# Altium PCB PC110.PcbDoc (part 21 of 24)
Units mm, origin at the board's own origin, x right, y up, seen from the top; angles counter-clockwise.
Board outline 150.05 x 107.35 mm, 10 copper layers (In2.Cu, F.Cu, B.Cu, In1.Cu, In3.Cu, In4.Cu, In5.Cu, In6.Cu, In7.Cu, In8.Cu); 936 components, 1434 nets, 4891 pads, 6088 vias.
Unrouted connection lines stored in the file: 2995.
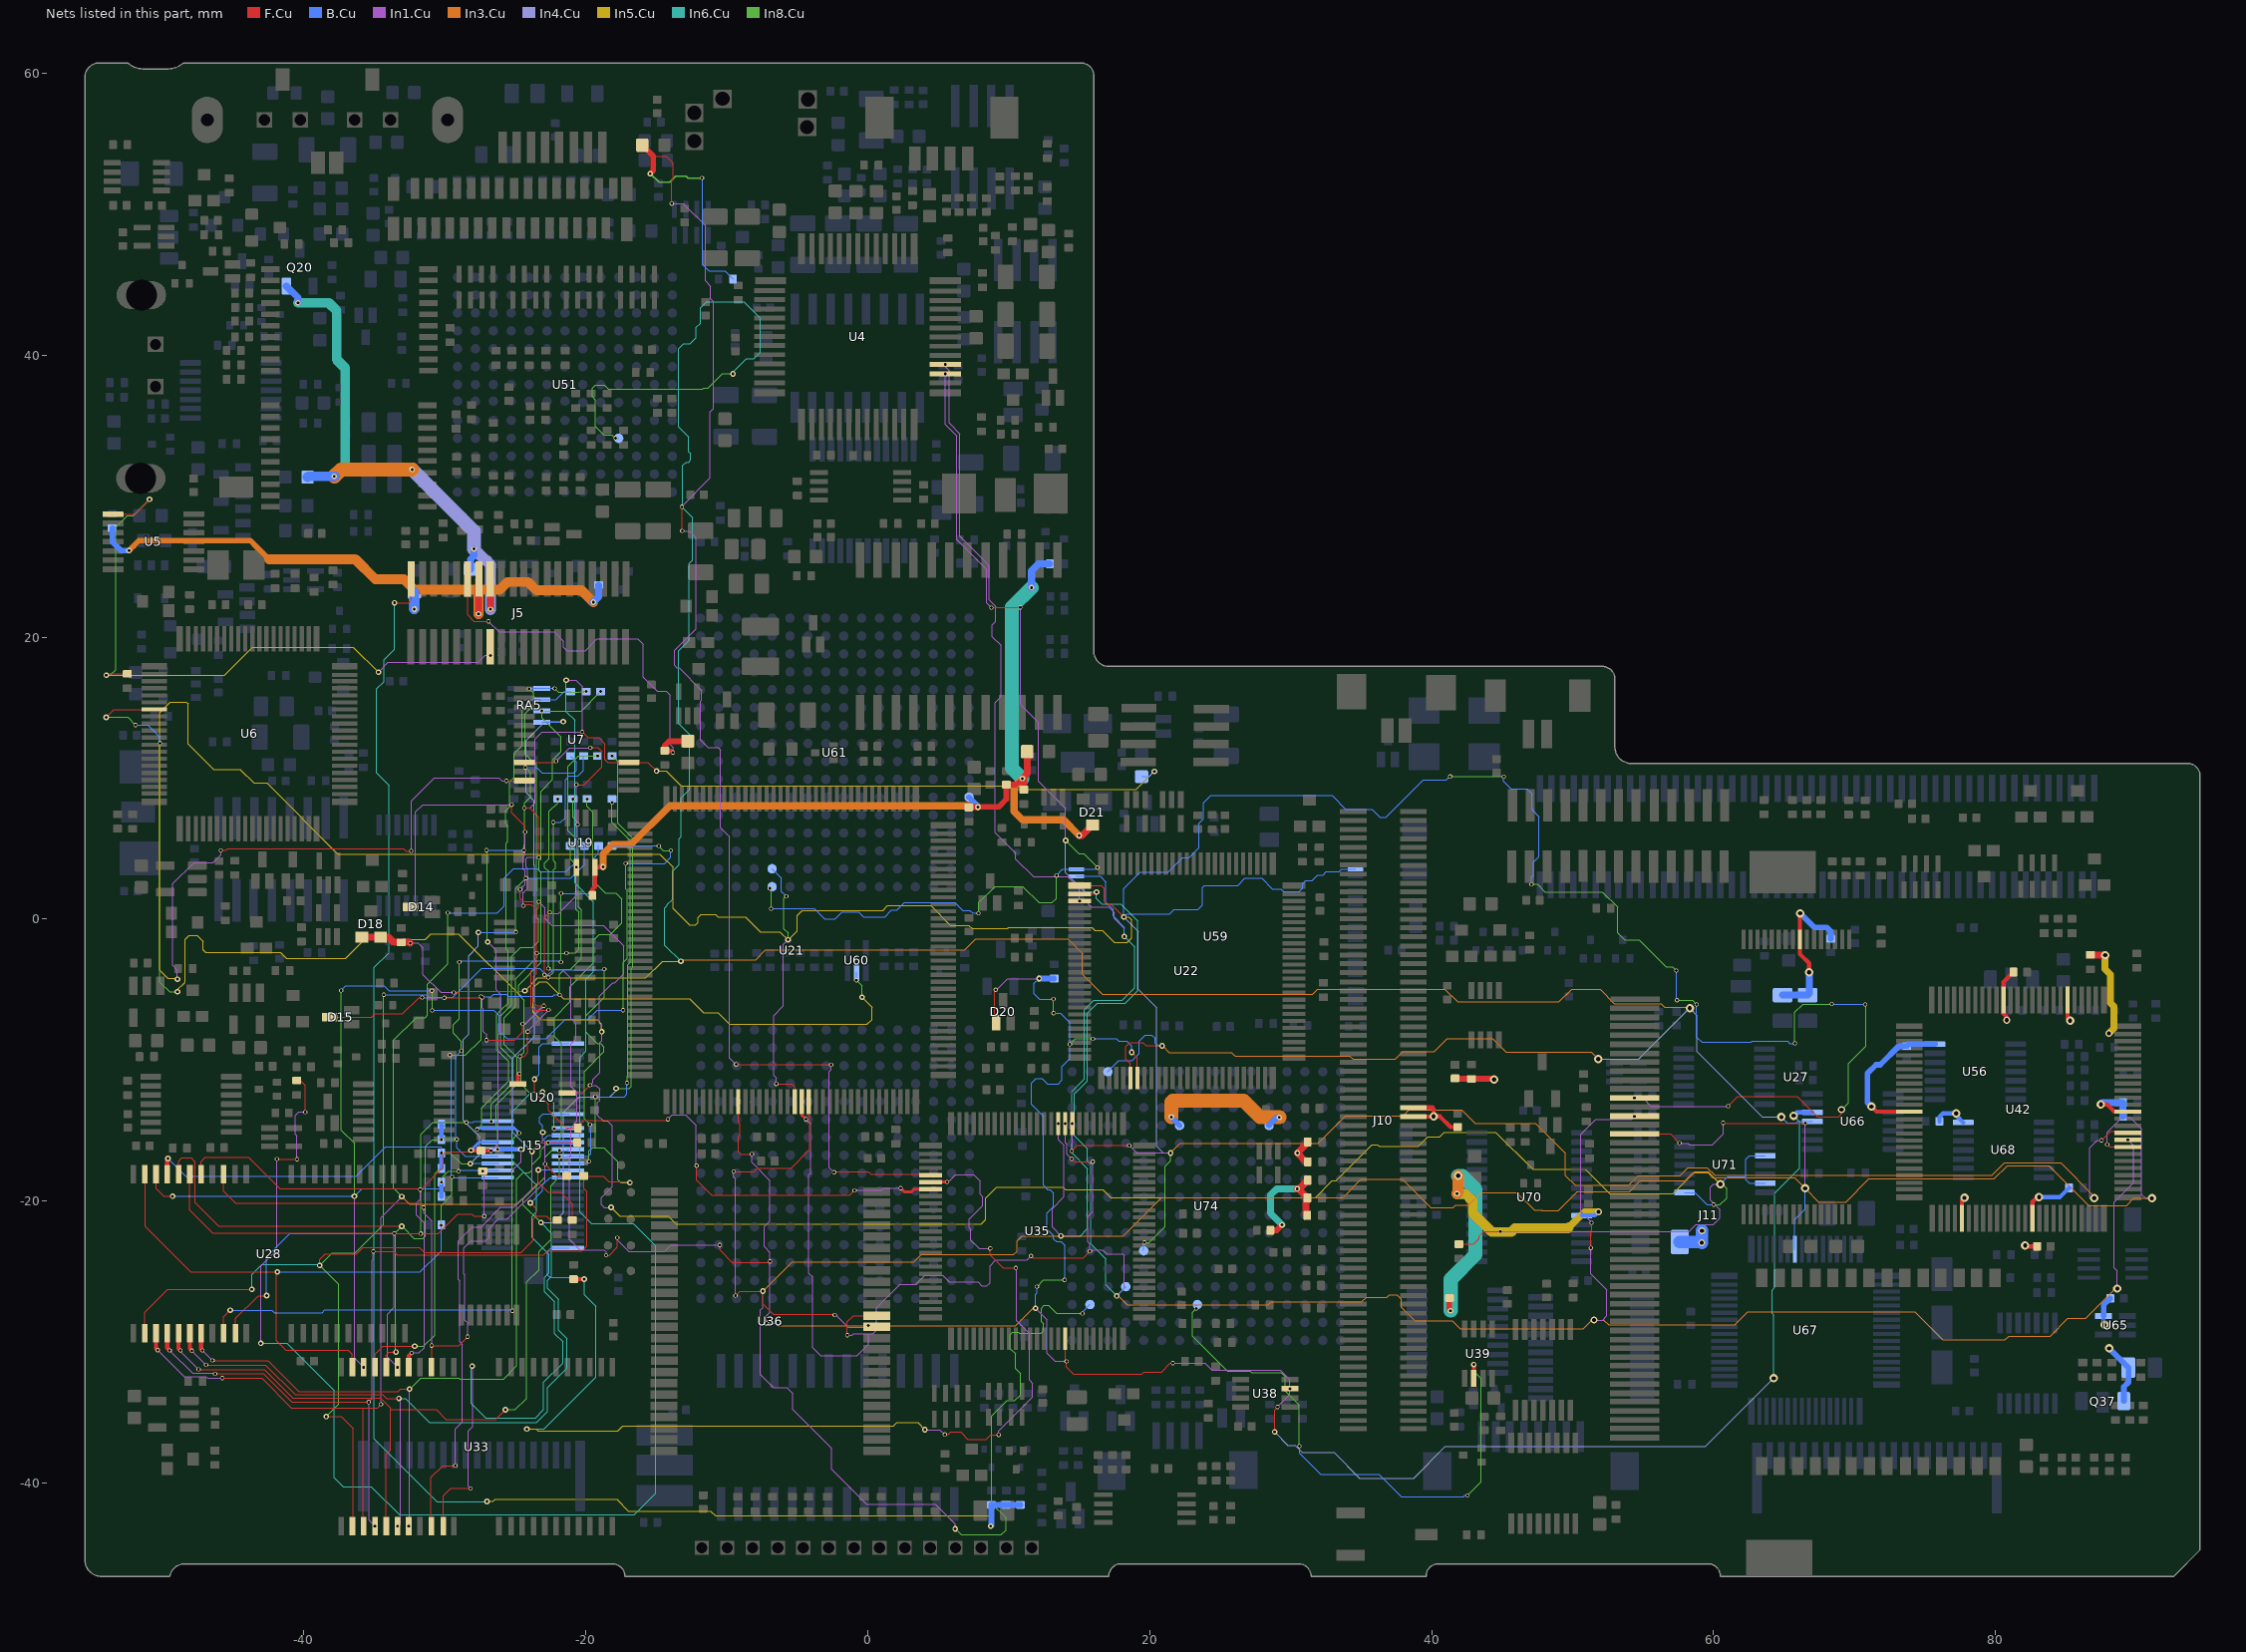
[diagram p28: the nets of this part, all layers, seen from the top]

## Via types
v1: diameter 0.3, hole 0.2, B.Cu to In8.Cu, tented both sides, 1934 vias
v2: diameter 0.4, hole 0.2, F.Cu to B.Cu, tented both sides, 1902 vias
v3: diameter 0.3, hole 0.2, F.Cu to In1.Cu, tented both sides, 1729 vias
v4: diameter 0.6, hole 0.3, F.Cu to B.Cu, tented both sides, 354 vias
v5: diameter 0.5, hole 0.3, F.Cu to B.Cu, tented both sides, 136 vias
v6: diameter 0.4, hole 0.2, B.Cu to In8.Cu, tented both sides, 12 vias
v7: diameter 0.3, hole 0.2, F.Cu to B.Cu, tented both sides, 6 vias
v8: diameter 0.6, hole 0.2, F.Cu to B.Cu, tented both sides, 4 vias
v9: diameter 0.5, hole 0.2, B.Cu to In8.Cu, tented both sides, 3 vias
v10: diameter 0.5, hole 0.2, F.Cu to B.Cu, tented both sides, 2 vias
v11: diameter 0.4, hole 0.3, F.Cu to B.Cu, tented both sides, 2 vias
v12: diameter 0.3, hole 0.2, F.Cu to In4.Cu, tented both sides, 2 vias
v13: diameter 0.6, hole 0.3, B.Cu to In8.Cu, tented both sides, 1 vias
v14: diameter 0.3, hole 0.2, F.Cu to In3.Cu, tented both sides, 1 vias

## Nets (pads, with @x,y where several pads share a name; then routed paths per layer and width w, separated by ;. In a path a pad name is that pad's centre, name@x,y a point inside that pad or via, vN(x,y) a via of type N, cw(c..) or ccw(c..) an arc to the next point about the centre after c; other vN are vias at no path point) (continued)
PNET10: C87.1 C119.1 C126.1 J10.34 J10.35 R126.1 R163.1 R164.1 R168.1 R174.1 R176.1 R179.1 U70.10 U74.N7 U74.N12 | length 58.4
  F.Cu w0.08: R174.1@31.21,-15.84 R174.1@31.21,-15.79 ; v4@44.38,-11.32 v4(44.43,-11.37)
  F.Cu w0.3: J10.35@38.7,-14 40.13,-14 v4(40.14,-13.99) ; J10.34@38.7,-13.35 40.06,-13.35 40.14,-13.43 v4(40.14,-13.99) ; C126.1@41.84,-14.74 41.35,-14.74 40.6,-13.99 v4(40.14,-13.99)
  F.Cu w0.4: C119.1@28.56,-22.06 29.01,-22.06 v2(29.39,-21.68) ; R179.1@41.25,-26.87 41.25,-27.68 v2(41.34,-27.77) ; C87.1@41.66,-11.29 41.69,-11.32 R126.1@42.83,-11.32 v4@44.38,-11.32
  F.Cu w0.5: R168.1@31.18,-21 31.08,-20.9 31.08,-20.07 31.19,-19.96 R163.1@31.19,-19.77 30.54,-19.12 v2(30.46,-19.12) 30.6,-19.12 R176.1@31.21,-18.51 ; R164.1@31.21,-17.21 31.09,-17.21 30.47,-16.59 v2(30.47,-16.58) R174.1@31.21,-15.84
  In3.Cu w0.8: v2(41.79,-19.47) 41.88,-19.38 v4(41.88,-18.2)
  In3.Cu w1: v2(21.54,-14.03) 21.54,-12.98 21.64,-12.88 26.48,-12.88 26.662,-12.88 27.832,-14.05 v2(29.19,-14.05)
  In5.Cu w0.5: 49.73,-21.86 50.84,-20.75 v5(51.83,-20.75)
  In5.Cu w0.7: v2(41.79,-19.47) 42.39,-19.47 42.91,-19.99 42.91,-20.84 44.26,-22.19 45.64,-22.19 45.9,-21.93 46.29,-21.93 46.3,-21.92 49.67,-21.92 49.73,-21.86
  In6.Cu w0.08: v2(41.34,-27.77) 41.35,-27.76 ; 42.79,-19.47 43.11,-19.15
  In6.Cu w0.5: v2(29.39,-21.68) 28.58,-20.87 28.58,-19.55 29.01,-19.12 v2(30.46,-19.12)
  In6.Cu w0.7: v2(41.79,-19.47) 42.79,-19.47
  In6.Cu w1: 41.35,-27.76 41.35,-25.55 43.11,-23.79 43.11,-19.15 42.18,-18.22 41.88,-18.22
  B.Cu w0.3: U70.10@50.645,-21.01 51.57,-21.01 v5(51.83,-20.75)
  B.Cu w0.4: v2(21.54,-14.03) 21.54,-14.04 U74.N7@22.11,-14.61 ; U74.N12@28.46,-14.61 29.02,-14.05 v2(29.19,-14.05)
PNET12: C94.1 C133.1 C236.1 C241.2 C262.2 C263.2 C271.1 F4.1 Q37.3 R134.2 R292.2 R300.2 R360.2 R361.2 R369.1 U27.8 U42.5 U42.15 U42.38 U42.56 U42.65 U42.88 U56.14 U65.5 U68.14 | length 57.4
  F.Cu w0.08: U42.65@80.6,-5.76 U42.65@80.61,-5.75 ; v4(82.1,-23.15) v4@82.16,-23.21
  F.Cu w0.3: v4(66.14,0.42) 66.12,0.4 66.12,-2.468 66.78,-3.128 v4(66.78,-3.76) ; v4(71.2,-13.29) 71.56,-13.65 U42.88@73.885,-13.65 ; U42.5@77.61,-21.225 77.61,-19.94 v4(77.79,-19.76) ; v5(80.8,-7.16) 80.8,-6.933 80.56,-6.693 U42.65@80.56,-5.725 80.56,-4.46 C94.1@81.27,-3.75 ; v4@82.16,-23.21 C133.1@82.95,-23.21 ; U42.15@82.61,-21.225 82.61,-20.05 82.94,-19.72 v4(83.09,-19.72) ; U42.56@85.11,-5.725 85.11,-7.02 v4(85.29,-7.2) ; v4(87.47,-13.13) 87.9,-13.13 88.42,-13.65 U42.38@89.385,-13.65
  F.Cu w0.5: R134.2@86.72,-2.53 86.74,-2.55 v4(87.77,-2.55)
  In5.Cu w0.5: v4(87.77,-2.55) 87.77,-3.54 88.15,-3.92 88.15,-5.94 88.4,-6.19 88.4,-7.74 v5(88.04,-8.1)
  B.Cu w0.08: v5(59.16,-22.95) v5@59.17,-22.94 ; v4@87.63,-28.78 v4(87.73,-28.78)
  B.Cu w0.3: C271.1@76.015,-14.33 76.015,-14.015 76.26,-13.77 v4(77.2,-13.77) 77.2,-13.915 U68.14@77.705,-14.42 ; v4(83.09,-19.72) 84.55,-19.72 R369.1@85.21,-19.06 ; U65.5@87.66,-28.15 87.66,-28.71 v4(87.73,-28.78)
  B.Cu w0.4: v4(66.14,0.42) 67.14,-0.58 68.02,-0.58 68.31,-0.87 C241.2@68.31,-1.39 ; v4(71.2,-13.29) 70.91,-13 70.91,-10.93 71.52,-10.32 71.81,-10.32 73.135,-8.995 73.7,-8.995 73.835,-8.86 U56.14@75.697,-8.86 ; U65.5@87.66,-28.15 87.66,-27.365 C263.2@88.135,-26.89 ; v4(88.06,-30.44) 89.42,-31.8 89.423,-31.8 89.44,-31.818 89.44,-32.83 89.1,-33.17 Q37.3@89.1,-34.18
  B.Cu w0.5: v5@59.11,-22.9 v5(59.16,-22.95) ; R300.2@64.89,-5.38 64.898,-5.388 R292.2@66.67,-5.388 66.78,-5.278 v4(66.78,-3.76) ; v4(87.47,-13.13) 87.6,-13 R360.2@89.04,-13 R361.2@89.04,-13.98
  B.Cu w0.9: F4.1@57.6,-22.9 v5@59.11,-22.9 ; v5@59.17,-22.94 v5(59.17,-22.1)
PS2_L1_Pluto: L1.1 R228.2 U35.30 | length 108.8
  F.Cu w0.08: -15.21,54.113 -14.303,54.113 -13.81,53.62 -13.81,52.49 -13.91,52.39 v3(-13.91,50.76) ; v3(-13.18,29.25) -13.18,27.56 v3(-13.16,27.54) ; v3(-9.34,-10.3) -2.62,-10.3 v3(-2.6,-10.32) ; v3(-2.39,-17.94) -2.35,-17.9 0.02,-17.9 0.22,-18.1 4.41,-18.1 U35.30@4.46,-18.15
  F.Cu w0.4: L1.1@-15.997,54.9 -15.21,54.113 -15.21,53.1 v2(-15.43,52.88)
  In1.Cu w0.08: v3(-13.91,50.76) -13.09,50.76 -11.51,49.18 -11.51,45.26 -11.15,44.9 -11.15,44 -10.93,43.78 -10.93,36.23 -11.17,35.99 -11.17,31.29 -13.18,29.28 v3(-13.18,29.25) ; v3(-13.16,27.54) -12.65,27.54 -12.19,27.08 -12.19,20.6 -13.71,19.08 -13.71,18 -13.54,17.83 -13.38,17.83 -11.77,16.22 -11.77,15.54 -11.86,15.45 -11.86,12.72 -11.32,12.18 -10.61,12.18 -10.44,12.01 -10.44,6.48 -9.8,5.84 -9.8,-9.84 v3(-9.34,-10.3) ; v3(-2.6,-10.32) -2.6,-10.67 -2.72,-10.79 -2.72,-17.61 v3(-2.39,-17.94)
  In8.Cu w0.08: v2(-15.43,52.88) -15.42,52.89
  In8.Cu w0.1: -15.42,52.89 -14.79,52.26 -14.06,52.26 -13.63,52.69 -12.87,52.69 -12.75,52.57 v1(-11.76,52.57)
  B.Cu w0.08: v1(-11.76,52.57) -11.7,52.51 -11.7,46.43 -11.24,45.97 -10.12,45.97 R228.2@-9.56,45.41
PSU_AUX_SW1: J5.28 R42.1 U5.1 | length 48.6
  F.Cu w0.08: v2(-54.01,17.31) -53.92,17.4 R42.1@-52.52,17.4 ; U5.1@-53.533,28.72 -52,28.72 v2(-50.94,29.78) ; J5.28@-26.78,19.33 -26.75,19.3 v3(-26.75,18.71)
  In1.Cu w0.08: v2(-34.71,17.52) -34.02,18.21 -27.64,18.21 -27.14,18.71 v3(-26.75,18.71)
  In5.Cu w0.08: v2(-54.01,17.31) -45.63,17.31 -43.64,19.3 -36.49,19.3 v2(-34.71,17.52)
  In8.Cu w0.08: v2(-54.01,17.31) -53.74,17.31 -53.34,17.71 -53.34,27.79 -52.51,28.62 -52.1,28.62 v2(-50.94,29.78)
PWRGD: D20.2 R314.1 U7.9 U19.6 U21.47 U22.56 U35.67 U38.3 U66.12 | length 235.1
  F.Cu w0.08: U7.9@-24.362,11.125 -22.185,11.125 v3(-22.11,11.2) ; v3(-22.92,-3.94) -22.92,0.14 v3(-22.56,0.5) ; v3(-20.66,9.54) -20.12,9.54 -18.87,10.79 -18.87,11.9 -19.14,12.17 v3(-19.68,12.17) ; v3(-18.55,-23.84) -18.34,-23.84 -17.76,-23.26 v3(-17.76,-22.59) ; v3(-10.49,-23.11) -10.49,-23.47 -9.63,-24.33 -6.99,-24.33 v3(-6.93,-24.27) ; U21.47@-9.18,-12.94 -9.18,-14.42 -9.065,-14.535 -9.065,-15.315 -9.18,-15.43 -9.18,-16.49 -9.01,-16.66 v3(-8.22,-16.66) ; v3(9.07,-5) 9.01,-5.06 9.01,-7.24 D20.2@9.12,-7.35 ; U35.67@14.01,-29.75 14.01,-31.27 v3(14.1,-31.36) 14.1,-31.72 14.09,-31.73 14.09,-31.77 14.59,-32.27 19.44,-32.27 19.6,-32.11 20.83,-32.11 21.46,-31.48 v3(21.64,-31.48) ; v2(18.72,-9.44) 19.13,-9.85 U22.56@19.13,-11.26 ; v2(28.86,-36.37) 28.86,-34.8 v3(29.06,-34.6)
  In1.Cu w0.08: v3(-22.92,-3.94) -22.66,-3.94 -22.27,-3.55 -21.67,-3.55 -21.04,-4.18 -21.04,-7.05 -20.7,-7.39 -20.7,-8.49 -21.06,-8.85 -21.06,-11.86 -20.62,-12.3 -20.62,-14.31 -21.06,-14.75 -21.06,-16.74 -21.17,-16.85 -21.17,-22.72 -20.43,-23.46 -18.7,-23.46 -18.55,-23.61 v3(-18.55,-23.84) ; v3(-22.56,0.5) -22.45,0.39 -21.94,0.39 -20.66,1.67 v3(-20.66,3.69) v3(-20.66,9.54) ; v3(-22.11,11.2) -21.15,12.16 -19.69,12.16 v3(-19.68,12.17) ; v3(-17.76,-22.59) -17.76,-22.76 -16.94,-23.58 -14.41,-23.58 -13.94,-23.11 v3(-10.49,-23.11) ; v3(-8.22,-16.66) -8.22,-17.25 -6.94,-18.53 -6.94,-21.4 -7.34,-21.8 -7.34,-23.21 -6.93,-23.62 v3(-6.93,-24.27) -6.93,-27.89 -7.18,-28.14 v2(-7.18,-28.65) ; v3(9.07,-5) 9.13,-5 9.92,-4.21 v2(12.16,-4.21) ; v2(11.9,-27.6) 12.71,-28.41 12.71,-30.79 13.28,-31.36 v3(14.1,-31.36) ; v3(21.64,-31.48) 23.92,-31.48 24.41,-31.97 29.27,-31.97 29.94,-32.64 v3(29.94,-33.3) 29.94,-33.72 v3(29.06,-34.6)
  In3.Cu w0.08: v2(-7.18,-28.65) -6.62,-28.65 -6.43,-28.84 10.49,-28.84 11.73,-27.6 v2(11.9,-27.6)
  In4.Cu w0.08: v2(28.86,-36.37) 29.8,-37.31 30.32,-37.31 30.83,-37.82 33.07,-37.82 34.9,-39.65 38.73,-39.65 40.98,-37.4 59.43,-37.4 v4(64.27,-32.56)
  In6.Cu w0.08: v4(64.27,-32.56) 64.27,-28.08 64.14,-27.95 64.14,-26.31 64.34,-26.11 64.34,-19.44 66.11,-17.67 66.11,-14.38 v4(65.67,-13.94)
  In8.Cu w0.08: v1(12,-26.06) 12.48,-25.58 v1(13.96,-25.58) ; v1(13.17,-5.66) 13.18,-5.67 v1(13.18,-6.67) ; v1(14.34,-8.87) 14.73,-8.48 v1(15.97,-8.48)
  B.Cu w0.08: v2(11.9,-27.6) 11.9,-26.61 12,-26.51 v1(12,-26.06) ; v2(12.16,-4.21) 11.81,-4.56 11.81,-5.3 12.17,-5.66 v1(13.17,-5.66) ; v1(13.18,-6.67) 13.68,-6.67 14.34,-7.33 v1(14.34,-8.87) 14.34,-9.88 13.77,-10.45 13.77,-11.42 13.51,-11.68 12.74,-11.68 12.35,-11.29 11.93,-11.29 11.61,-11.61 11.61,-13.13 12.45,-13.97 12.45,-18.87 12.76,-19.18 12.93,-19.18 13.18,-19.43 13.18,-20.39 12.71,-20.86 12.71,-21.97 13.19,-22.45 13.19,-22.67 13.39,-22.87 13.72,-22.87 13.98,-23.13 13.98,-25.56 v1(13.96,-25.58) ; v1(15.97,-8.48) 17.64,-8.48 17.82,-8.66 18.38,-8.66 18.72,-9 v2(18.72,-9.44)
  B.Cu w0.3: v4(65.67,-13.94) 65.91,-13.7 U66.12@67.007,-13.7
  B.Cu w0.4: v2(12.16,-4.21) R314.1@13.22,-4.21
PWRGD_shift: C248.1 R87.2 U7.16 U20.1 | length 204.1
  F.Cu w0.08: v3(-41.91,-17) -41.88,-17.03 v3(-40.48,-17.03) ; R87.2@-40.5,-11.45 -40.25,-11.45 -39.89,-11.81 v3(-39.89,-13.68) ; v3(-24.68,-9.73) -24.38,-9.73 -24.12,-9.47 v3(-24.12,-7.97) ; v3(-24.43,0.95) -24.3,0.95 -24.2,1.05 -23.88,1.05 -23.68,0.85 -23.68,-3.47 -23.88,-3.67 -23.88,-6.21 -23.65,-6.44 v3(-22.64,-6.44) ; v3(-24.36,7.89) -23.99,7.89 -23.34,7.24 v3(-23.34,4.39) ; v3(-20.25,13.28) -19.85,12.88 -19.08,12.88 -18.63,12.43 -18.63,11.32 -18.435,11.125 U7.16@-16.937,11.125 -15.595,11.125 v2(-14.98,10.51)
  F.Cu w0.3: U20.1@-24.82,-11.68 -24.82,-11.06 v3(-24.72,-10.96)
  In1.Cu w0.08: v2(-43.05,-30.08) -43.05,-24.59 -41.91,-23.45 v3(-41.91,-17) ; v3(-40.48,-17.03) -40.48,-15.38 -40.6,-15.26 -40.6,-13.91 -40.37,-13.68 v3(-39.89,-13.68) ; v3(-24.72,-10.96) -24.68,-10.92 v3(-24.68,-9.73) ; v3(-24.43,0.95) -24.43,1.87 -24.11,2.19 -24.11,3.56 -24.23,3.68 -24.23,4.28 -24.12,4.39 v3(-23.34,4.39) ; v3(-24.36,7.89) -23.96,7.89 -23.61,8.24 -23.61,12.78 -23.11,13.28 v3(-20.25,13.28) -20.25,16.5 -20.7,16.95 v2(-21.39,16.95) ; v3(-24.12,-7.97) -24.12,-7.95 -22.64,-6.47 v3(-22.64,-6.44)
  In5.Cu w0.08: v2(-14.98,10.51) -14.3,10.51 -13.23,9.44 10.26,9.44 10.5,9.2 19.05,9.2 v2(20.33,10.48)
  In6.Cu w0.08: v2(-43.05,-30.08) -41.19,-30.08 -37.83,-33.44 -37.83,-39.61 -37.2,-40.24 -35.24,-40.24 -33.23,-42.25 -16.57,-42.25 -15.04,-40.72 -15.04,-23.17 -16.62,-21.59 -19.61,-21.59 -20.43,-20.77 -20.43,-9.8 -19.98,-9.35 -19.98,-4.26 -19.45,-3.73 -19.45,1.23 -20.77,2.55 -20.77,14.12 -21.39,14.74 v2(-21.39,16.95)
  B.Cu w0.08: C248.1@19.42,10.115 19.965,10.115 v2(20.33,10.48)
PWRGD_shift_buff: D14.3 D15.3 R181.2 U6.27 U20.7 U60.2 U71.1 U71.10 U71.13 | length 298.6
  F.Cu w0.08: v2(-54.02,14.32) -53.46,14.88 U6.27@-50.6,14.88 ; D15.3@-38.15,-6.95 -35.2,-6.95 -34.96,-6.71 -33,-6.71 -31.85,-5.56 v3(-31.6,-5.56) ; v3(-30.04,-5.57) -30.03,-5.56 v3(-27.33,-5.56) ; v3(-27.04,-8.58) -25.05,-8.58 -24.48,-8.01 v3(-24.48,-7.42) ; v3(-25.26,8.12) -25.26,7.55 -24.3,6.59 v3(-24.3,6.19) ; v3(-24.66,2.12) -24.66,1.48 -24.42,1.24 v3(-23.34,1.24) -23.34,0.83 -23.49,0.68 -23.49,-3.82 -23.7,-4.03 -23.7,-5.92 -23.49,-6.13 v3(-22.98,-6.13) ; U20.7@-21.32,-12.33 -20.25,-12.33 v3(-19.7,-11.78) ; R181.2@41.93,-23.05 42.99,-23.05 43.38,-22.66 43.38,-22.47 43.7,-22.15 v3(44.87,-22.15)
  In1.Cu w0.08: v3(-32.06,0.75) -32.07,0.76 -32.07,7.61 -31.56,8.12 v3(-25.26,8.12) ; v3(-31.6,-5.56) -30.05,-5.56 v3(-30.04,-5.57) ; v3(-27.33,-5.56) -27.33,-6.27 -27.28,-6.32 -27.28,-7.96 -27.04,-8.2 v3(-27.04,-8.58) ; v3(-24.66,2.12) -24.31,2.47 -24.31,3.43 -24.44,3.56 -24.44,4.44 -24.3,4.58 v3(-24.3,6.19) ; v3(-24.48,-7.42) -24.27,-7.42 v3(-22.98,-6.13) ; v3(-23.34,1.24) -22.89,0.79 -22.89,0.04 -22.4,-0.45 -18.74,-0.45 -17.31,-1.88 -17.31,-3.89 -17.93,-4.51 -18.09,-4.51 -19.04,-5.46 -19.04,-7.37 -18.87,-7.54 v2(-18.87,-7.98) -18.87,-8.6 -19.015,-8.745 -19.015,-10.885 -19.51,-11.38 -19.51,-11.59 v3(-19.7,-11.78) -19.27,-11.78 -19.01,-12.04 -19.01,-12.85 -19.16,-13 -19.16,-13.9 -18.76,-14.3 -18.48,-14.3 -18.13,-14.65 -18.13,-18.98 -18.89,-19.74 -18.89,-20.23 -18.68,-20.44 v2(-18.2,-20.44) ; v3(44.87,-22.15) 58.27,-22.15 58.76,-21.66 59.99,-21.66 60.44,-21.21 60.44,-20.6 59.77,-19.93 59.77,-19.01 59.99,-18.79 v4(60.48,-18.79)
  In5.Cu w0.08: v2(-48.97,-5.15) -48.97,-5.02 -48.46,-4.51 -48.46,-4.46 -48.43,-4.43 -48.43,-1.45 -48.13,-1.15 -47.58,-1.15 -47.14,-1.59 -47.13,-1.59 -47.13,-2.16 -46.95,-2.34 -41.67,-2.34 -41.25,-2.76 -37.04,-2.76 -35.7,-1.42 -31.39,-1.42 -31,-1.03 -29.04,-1.03 -24.6,-5.47 -23.73,-5.47 ; v2(-18.87,-7.98) -18.88,-7.97 -18.88,-7.44 -19.19,-7.13 -23.2,-7.13 -23.73,-6.6 -23.73,-5.47 ; v2(-18.2,-20.44) -17.58,-21.06 -14.15,-21.06 -13.595,-21.615 8.055,-21.615 8.34,-21.33 8.34,-21.29 8.35,-21.28 8.35,-19.79 9.13,-19.01 13.85,-19.01 14.01,-19.17 16.68,-19.17 17.24,-19.73 31.78,-19.73 32.95,-18.56 33.21,-18.56 35.78,-15.99 36.16,-15.99 36.29,-16.12 39.05,-16.12 39.74,-15.43 40.57,-15.43 40.89,-15.11 44.55,-15.11 47.17,-17.73 50.9,-17.73 52.64,-19.47 57.11,-19.47 58.66,-17.92 59.61,-17.92 v4(60.48,-18.79) ; v2(-0.4,-5.54) -0.39,-5.54 0.3,-6.23 0.3,-7.11 -0.04,-7.45 -9.79,-7.45 -10.62,-6.62 -11.66,-6.62 -12.64,-5.64 -21.58,-5.64 -22.79,-4.43 -23.28,-4.43 -23.73,-4.88 -23.73,-5.47
  In8.Cu w0.08: v2(-54.02,14.32) -52.49,14.32 v1(-51.94,13.77) ; v1(-50.21,12.49) -50.21,-4.47 -49.53,-5.15 v2(-48.97,-5.15) ; v1(-0.8,-4.33) -0.4,-4.73 v2(-0.4,-5.54) ; v1(60,-20.24) 60.46,-20.24 60.925,-19.775 60.925,-19.1 60.615,-18.79 v4(60.48,-18.79)
  B.Cu w0.08: v1(-51.94,13.77) -51.06,13.77 -50.21,12.92 v1(-50.21,12.49) ; v1(-0.8,-4.33) -0.8,-3.78 U60.2@-0.79,-3.77 ; U71.1@57.937,-19.38 58.67,-19.38 59.53,-20.24 v1(60,-20.24) ; v4(60.48,-18.79) 61.02,-18.25 62.28,-18.25 62.28,-18.06 ; U71.13@63.663,-18.73 62.54,-18.73 62.28,-18.47 62.28,-18.06 ; U71.10@63.663,-16.78 62.53,-16.78 62.28,-17.03 62.28,-18.06
Q43_2: C222.2 D51.1 J5.13 Q20.2 | length 40.4
  F.Cu w0.5: J5.13@-26.78,24.13 -26.76,24.11 v2(-26.76,21.98)
  In3.Cu w1: v2(-37.84,31.41) -37.35,31.9 v2(-32.32,31.9)
  In4.Cu w0.8: v2(-27.93,26.26) -27.14,25.47 -27.09,25.47 -26.76,25.14 v2(-26.76,21.98)
  In4.Cu w1: v2(-32.32,31.9) -27.93,27.51 v2(-27.93,26.26)
  In6.Cu w0.7: v2(-40.42,43.72) -38.23,43.72 -37.67,43.16 -37.67,39.69 -37.07,39.09 -37.07,32.17 -37.83,31.41 v2(-37.84,31.41)
  B.Cu w0.5: Q20.2@-41.24,44.9 -40.42,44.08 v2(-40.42,43.72) ; C222.2@-28.18,24.815 -28.18,25.52 -27.93,25.77 v2(-27.93,26.26)
  B.Cu w0.7: D51.1@-39.733,31.36 -39.682,31.41 v2(-37.84,31.41)
R73_2: C66.2 J5.15 R104.2 | length 28.5
  F.Cu w0.08: J5.15@-28.38,24.13 -28.38,21.58 -27.93,21.13 v3(-26.91,21.13)
  F.Cu w0.3: R104.2@-14.4,11.95 -13.94,11.95 v3(-13.82,11.83)
  F.Cu w0.4: R104.2@-14.4,11.95 -14.4,12.31 -14.085,12.625 C66.2@-12.76,12.625
  In1.Cu w0.08: v3(-26.91,21.13) -26.15,20.37 -22.23,20.37 -21.58,19.72 -21.58,19.29 -21.34,19.05 -20.04,19.05 -19.21,19.88 -16.3,19.88 -15.93,19.51 -15.93,17.18 -14.94,16.19 -14.31,16.19 -14.02,15.9 -14.02,12.39 -13.82,12.19 v3(-13.82,11.83)
R284_2: C218.1 J5.14 R266.1 R281.2 | length 46.1
  F.Cu w0.5: v2(-27.61,21.65) -27.61,24.1 J5.14@-27.58,24.13
  In3.Cu w0.4: v2(-52.4,26.14) -52.07,26.47 -51.68,26.86 -51.67,26.86 -43.81,26.86 -43.29,26.34 -42.49,25.54 -42.47,25.54
  In3.Cu w0.7: -42.47,25.54 -36.36,25.54 -34.93,24.11 -32.9,24.11 -32.16,23.37 ; v2(-32.16,21.99) -32.16,23.37 ; v2(-27.61,21.65) -27.6,21.66 -27.6,23.34 -27.57,23.37 ; v2(-19.46,22.49) -20.29,23.32 -20.29,23.34 -23.51,23.34 -24.09,23.92 -25.56,23.92 -26.11,23.37 -27.57,23.37 ; -32.16,23.37 -27.57,23.37
  B.Cu w0.4: R281.2@-53.59,27.74 -53.59,26.76 -52.97,26.14 v2(-52.4,26.14)
  B.Cu w0.5: v2(-19.46,22.49) -19.1,22.85 R266.1@-19.1,23.7
  B.Cu w0.7: v2(-32.16,21.99) C218.1@-32.16,23.185
R412_1: J5.20 R409.1 R410.1 R412.1 | length 113.7
  F.Cu w0.08: v2(-33.57,22.44) -32.57,22.44 -32.38,22.63 J5.20@-32.38,24.13
  In5.Cu w0.08: v2(-27.01,-41.3) -27,-41.29 -26.57,-41.29 -26.42,-41.14 -17.81,-41.14 -16.98,-41.97 -11.16,-41.97 -10.81,-42.32 8.56,-42.32 8.72,-42.48 v2(8.72,-43.05)
  In6.Cu w0.08: v2(-33.57,22.44) -33.57,19.15 -34.32,18.4 -34.32,16.86 -34.83,16.35 -34.83,10.36 -33.96,9.49 -33.96,-2.38 -35.01,-3.43 -35.01,-36.85 -30.56,-41.3 v2(-27.01,-41.3)
  B.Cu w0.08: v2(8.72,-43.05) v2@8.77,-43
  B.Cu w0.4: v2@8.77,-43 R409.1@8.77,-41.54 R410.1@9.82,-41.54 R412.1@10.83,-41.54
RAM_A0: J15.17 R346.1 R400.1 R404.1 U28.18 U33.18 | length 78.4
  F.Cu w0.08: U28.18@-48.885,-18.095 -48.885,-17.155 -48.66,-16.93 -48.01,-16.93 -47.7,-17.24 -47.7,-20.1 -46.04,-21.76 -33.07,-21.76 v2(-33.05,-21.78) ; U33.18@-34.155,-31.775 -34.155,-30.905 -33.95,-30.7 v2(-33.46,-30.7)
  In8.Cu w0.08: v2(-33.46,-30.7) -33.49,-30.67 -33.49,-22.22 v2(-33.05,-21.78) -32.18,-22.65 -31.54,-22.65 -31.37,-22.48 -31.37,-16.12 -30.88,-15.63 v1(-30.24,-15.63) -30.22,-15.61 v1(-29.15,-15.61) ; v1(-28.97,-3.04) -28.97,-7.05 -29.41,-7.49 -29.41,-8.09 -28.83,-8.67 v1(-28.83,-9.33) ; v1(-21.76,-3.05) v1(-21.76,1.83)
  B.Cu w0.08: v1(-28.97,-3.04) -28.9,-2.97 -21.84,-2.97 v1(-21.76,-3.05) ; v1(-28.83,-9.33) -29.23,-9.73 -29.23,-15.53 v1(-29.15,-15.61) -29.15,-16.2 -28.53,-16.82 -26.22,-16.82 J15.17@-26.21,-16.83 ; v1(-21.76,1.83) -19.83,1.83 -19.46,2.2 -19.46,4.31 -19.09,4.68 R346.1@-19.09,5.2
  B.Cu w0.2: v1(-30.24,-15.63) R400.1@-30.11,-15.5 ; R404.1@-30.24,-14.55 R404.1@-30.11,-14.68
  B.Cu w0.3: v1(-30.24,-15.63) R404.1@-30.24,-14.55
RAM_A1: J15.18 R338.1 R403.1 R406.1 U28.19 U33.19 | length 76.9
  F.Cu w0.08: U33.19@-34.955,-31.775 -34.955,-30.855 -34.38,-30.28 v2(-32.13,-30.28)
  F.Cu w0.3: U28.19@-49.685,-18.095 -49.685,-17.015 v2(-49.64,-16.97)
  In4.Cu w0.08: v2(-28.19,-17.34) -27.53,-16.68 -27.53,-15.45 -28.7,-14.28 -28.7,-8.55 -28.31,-8.16 -28.31,-2.6 -27.62,-1.91 v2(-27.62,-0.94)
  In8.Cu w0.08: v2(-32.13,-30.28) -31.5,-30.28 -30.72,-29.5 -30.72,-18.04 -30.24,-17.56 v1(-30.24,-16.59) -29.59,-16.59 -28.84,-17.34 v2(-28.19,-17.34) ; v1(-24.96,-0.91) -24.96,2.19 v1(-24.24,2.91)
  B.Cu w0.08: v2(-49.64,-16.97) -48.37,-18.24 -36.3,-18.24 -34.19,-16.13 -30.33,-16.13 -30.24,-16.22 v1(-30.24,-16.59) ; v2(-28.19,-17.34) -28.17,-17.32 -26.22,-17.32 J15.18@-26.21,-17.33 ; v2(-27.62,-0.94) -24.99,-0.94 v1(-24.96,-0.91) ; v1(-24.24,2.91) -21.05,2.91 -20.09,3.87 R338.1@-20.09,5.2
  B.Cu w0.3: R406.1@-30.24,-17.68 v1(-30.24,-16.59)
RAM_A2: J15.19 R342.1 R401.1 R402.1 U28.20 U33.20 | length 97.8
  F.Cu w0.08: U28.20@-50.485,-18.095 -50.485,-19.105 -49.94,-19.65 v2(-49.31,-19.65)
  In1.Cu w0.08: v2(-36.41,-19.65) -36.39,-19.67 -36.39,-31.14 v3(-35.755,-31.775)
  In8.Cu w0.08: v1(-37.35,-5.05) -37.35,-14.97 -36.41,-15.91 v2(-36.41,-19.65) ; v1(-30.91,-5.07) -30.89,-5.09 v1(-30.89,-6.47) ; v1(-30.24,-18.65) -30.24,-18.36 -29.76,-17.88 v1(-29.03,-17.88) ; v1(-17.35,-6.45) -17.35,-3.05 -17.07,-2.77 -17.07,2.05 -17.17,2.15 v1(-17.17,3.95) ; v1(-14.83,5.19) -14.51,4.87 v1(-13.97,4.87)
  B.Cu w0.08: v2(-49.31,-19.65) v2(-36.41,-19.65) -35.87,-19.11 -30.27,-19.11 -30.24,-19.08 v1(-30.24,-18.65) ; v1(-37.35,-5.05) -37.02,-4.72 -34.32,-4.72 -33.97,-5.07 v1(-30.91,-5.07) ; v1(-30.89,-6.47) -26.52,-6.47 -26.14,-6.85 -26.14,-7.93 -25.59,-8.48 -22.82,-8.48 -21.44,-7.1 -19.84,-7.1 -19.19,-6.45 v1(-17.35,-6.45) ; v1(-29.03,-17.88) -28.97,-17.82 -26.22,-17.82 J15.19@-26.21,-17.83 ; R342.1@-18.12,5.2 -14.84,5.2 v1(-14.83,5.19) ; v1(-17.17,3.95) -14.42,3.95 -13.97,4.4 v1(-13.97,4.87)
  B.Cu w0.3: R401.1@-30.24,-19.67 v1(-30.24,-18.65)
RAM_A3: J15.20 R337.1 R405.1 U28.21 U33.21 | length 87.2
  F.Cu w0.08: U28.21@-51.285,-18.095 -51.26,-18.12 -51.26,-21.8 -48.04,-25.02 v2(-41.87,-25.02) -41.95,-25.1 -41.95,-29.89 -41.28,-30.56 -36.85,-30.56 -36.555,-30.855 U33.21@-36.555,-31.775
  In8.Cu w0.08: v1(-30.26,-21.7) -30.26,-20.3 -29.49,-19.53 v1(-29.49,-18.28) ; v1(-29.64,-9.64) -28.54,-9.64 -27.43,-8.53 v1(-27.43,-5.49) ; v1(-21.85,-5.37) -21.87,-5.35 -21.87,-3.92 -21.5,-3.55 -21.09,-3.55 -20.31,-2.77 -20.31,0.65 -20.51,0.85 -20.51,5.52 -21.26,6.27 -21.26,10.84 -20.52,11.58 v1(-19.16,11.58)
  B.Cu w0.08: v2(-41.87,-25.02) -31.75,-25.02 -30.26,-23.53 v1(-30.26,-21.7) ; v1(-29.64,-9.64) -29.55,-9.73 -29.55,-18.22 v1(-29.49,-18.28) -29.45,-18.32 -26.22,-18.32 J15.20@-26.21,-18.33 ; v1(-27.43,-5.49) -26.7,-5.49 -26.53,-5.32 -25.63,-5.32 -25.5,-5.45 -22.34,-5.45 -22.26,-5.37 v1(-21.85,-5.37)
RAM_A4: J15.41 R155.2 R334.1 U28.24 U33.24 | length 113.9
  F.Cu w0.08: U28.24@-51.285,-29.37 -51.285,-27.885 -49.65,-26.25 v2(-43.69,-26.25) ; v2(-38.88,-24.56) -38.88,-24.14 -38.47,-23.73 -36.25,-23.73 -35.8,-23.28 -31.8,-23.28 -31.46,-23.62 -24.57,-23.62 -23.74,-22.79 -23.74,-21.27 -23.54,-21.07 ; v2(-38.41,-35.28) -37.36,-35.28 -36.51,-36.13 -36.51,-43.005 U33.24@-36.555,-43.05 ; v2(-23.93,-20.12) -23.54,-20.51 -23.54,-21.07 ; R155.2@-22.03,-21.35 -22.49,-21.35 -22.77,-21.07 -23.54,-21.07
  In6.Cu w0.08: v2(-43.69,-26.25) -43.69,-25.21 -42.97,-24.49 -38.95,-24.49 v2(-38.88,-24.56)
  In8.Cu w0.08: v2(-38.41,-35.28) -37.52,-34.39 -37.52,-25.91 -38.87,-24.56 v2(-38.88,-24.56) -38,-23.68 -36.37,-23.68 -34.33,-21.64 v1(-34.33,-5.36) ; v1(-22.66,-4.13) -22.28,-3.75 -22.28,3.5 -22.14,3.64 -22.14,3.99 -22.3,4.15 v1(-22.3,6.88)
  B.Cu w0.08: v1(-34.33,-5.36) -31.29,-5.36 -31.11,-5.54 -29.42,-5.54 -27.38,-3.5 -23.29,-3.5 v1(-22.66,-4.13) ; v2(-23.93,-20.12) -23.06,-19.25 -23.06,-18.84 -22.54,-18.32 -21.22,-18.32 J15.41@-21.21,-18.33 ; v1(-22.3,6.88) -21.78,6.88 -21.45,7.21 -21.45,9.88 -21.18,10.15 -20.55,10.15 -20.15,10.55 R334.1@-20.15,11.58
RAM_A5: J15.42 R153.2 R333.1 U28.25 U33.25 | length 100.2
  F.Cu w0.08: v3(-45.78,-32.55) -42.98,-32.55 -40.87,-34.66 -35.79,-34.66 ; U33.25@-35.755,-43.05 -35.78,-43.025 -35.78,-34.67 -35.79,-34.66 ; v3(-34.53,-34.41) -34.78,-34.66 -35.79,-34.66 ; v2(-23.37,-17.78) -23.37,-18.66 -22.67,-19.36 -21.8,-19.36 -20.95,-20.21 R153.2@-20.95,-21.35
  F.Cu w0.3: U28.25@-50.485,-29.37 -50.485,-30.445 v3(-50.36,-30.57)
  In1.Cu w0.08: v3(-50.36,-30.57) -48.5,-32.43 -46.95,-32.43 -46.83,-32.55 v3(-45.78,-32.55) ; v3(-34.53,-34.41) -34.53,-21.15 v2(-33.05,-19.67)
  In3.Cu w0.08: v2(-33.05,-19.67) -32.5,-20.22 -24.88,-20.22 -23.37,-18.71 v2(-23.37,-17.78)
  In8.Cu w0.08: v2(-33.05,-19.67) -33.63,-19.09 -33.63,-8.59 -32.01,-6.97 -31.39,-6.97 -31.24,-6.82 -31.24,-4.62 -29.79,-3.17 v1(-29.79,0.45) ; v1(-20.91,8.53) -20.91,7.24 -20.58,6.91 v1(-20.58,6.71)
  B.Cu w0.08: v1(-29.79,0.45) -26.28,0.45 -25.78,0.95 -25.78,2.92 -25.1,3.6 -23.44,3.6 -23.2,3.36 -21.41,3.36 -20.6,4.17 -20.6,6.69 v1(-20.58,6.71) ; v2(-23.37,-17.78) -21.29,-17.78 J15.42@-21.25,-17.82
RAM_A6: J15.43 R150.1 R343.1 U28.26 U33.26 | length 95.1
  F.Cu w0.08: v3(-46.29,-32.24) -42.85,-32.24 -40.84,-34.25 v3(-35.4,-34.25) ; v3(-35.07,-23.57) -33.61,-23.57 -33.38,-23.8 -22.99,-23.8 -22.72,-23.53 -20.26,-23.53 -19.92,-23.19 -19.92,-19.33 -20.14,-19.11 R150.1@-20.14,-18.21 -18.77,-18.21 -18.37,-18.61 -16.95,-18.61 v2(-16.87,-18.69)
  F.Cu w0.3: U28.26@-49.685,-29.37 -49.685,-30.415 v3(-49.52,-30.58)
  In1.Cu w0.08: v3(-49.52,-30.58) -49.52,-30.59 -47.9,-32.21 -46.32,-32.21 v3(-46.29,-32.24) ; v3(-35.07,-23.57) -35.07,-24.13 -35.15,-24.21 -35.15,-34 v3(-35.4,-34.25) -35.38,-34.27 -35.38,-42.625 v3(-34.955,-43.05)
  In8.Cu w0.08: v1(-19.77,-17.19) -19.77,-16.44 -19.53,-16.2 -19.31,-16.2 ; v1(-19.32,-12.59) -19.32,-16.19 -19.31,-16.2 ; v1(-18.14,8.28) -18.14,6.86 -16.86,5.58 -16.86,-3.06 -17.03,-3.23 -17.03,-11.09 -17.07,-11.13 -17.07,-11.61 v1(-17.08,-11.62) ; v2(-16.87,-18.69) -17.52,-18.69 -17.72,-18.49 -17.72,-17.2 -18.72,-16.2 -19.31,-16.2
  B.Cu w0.08: J15.43@-21.25,-17.32 -19.9,-17.32 v1(-19.77,-17.19) ; v1(-19.32,-12.59) -17.26,-12.59 -17.08,-12.41 v1(-17.08,-11.62)
RAM_A7: J15.44 R352.1 U28.27 U33.27 | length 89.6
  F.Cu w0.08: v3(-47.46,-31.93) -42.8,-31.93 -40.78,-33.95 -34.57,-33.95 -33.86,-34.66 -33.86,-34.78 ; U33.27@-34.155,-43.05 -34.18,-43.025 -34.18,-37.97 -33.86,-37.65 -33.86,-34.78 ; v2(-25.7,-34.79) -26.39,-35.48 -29.91,-35.48 -30.61,-34.78 -33.86,-34.78
  F.Cu w0.3: U28.27@-48.885,-29.37 -48.885,-30.455 v3(-48.76,-30.58)
  In1.Cu w0.08: v3(-48.76,-30.58) -48.76,-30.63 v3(-47.46,-31.93)
  In8.Cu w0.08: v2(-25.7,-34.79) -25,-34.79 -24.19,-33.98 -24.19,-25.74 -23.33,-24.88 -23.33,-23.58 -22.48,-22.73 -22.48,-18.89 -21.86,-18.27 v1(-21.86,-16.84) ; v1(-22.65,-3.51) -22.65,3.4 -22.91,3.66 -22.91,3.98 -22.61,4.28 -22.61,7.64 -21.98,8.27 v1(-21.98,8.53) ; v1(-19.71,-14.56) -20.11,-14.16 -20.11,-10.81 -18.7,-9.4 -18.7,-9.06 -18.93,-8.83 -19.18,-8.83 -19.99,-8.02 -19.99,-6.85 -18.69,-5.55 v1(-18.69,-3.54)
  B.Cu w0.08: v1(-22.65,-3.51) -22.58,-3.58 -18.73,-3.58 v1(-18.69,-3.54) ; J15.44@-21.25,-16.82 -21.27,-16.84 v1(-21.86,-16.84) -21.22,-16.84 -21.21,-16.83 -19.85,-16.83 -19.65,-16.63 -19.65,-14.62 v1(-19.71,-14.56)
RAM_A8: J15.45 R347.1 U28.28 U33.28 | length 100.2
  F.Cu w0.08: v3(-46.93,-31.61) -42.72,-31.61 -40.62,-33.71 -34.41,-33.71 -34.13,-33.99 v2(-33.26,-33.99)
  F.Cu w0.3: U28.28@-48.085,-29.37 -48.085,-30.465 v3(-47.94,-30.61)
  In1.Cu w0.08: v3(-47.94,-30.61) -46.94,-31.61 v3(-46.93,-31.61) ; v3(-33.355,-43.05) -33.16,-42.855 -33.16,-34.09 v2(-33.26,-33.99)
  In4.Cu w0.08: v2(-23.18,-21.52) -22.34,-21.52 -22.32,-21.5 -22.28,-21.5 -21.59,-20.81 -21.59,-13.71 -20.47,-12.59 -18.28,-12.59 -17.85,-12.16 v2(-17.85,-12.01)
  In6.Cu w0.08: v2(-33.26,-33.99) -32.78,-33.99 -31.08,-35.69 -23.48,-35.69 -22.72,-34.93 -22.72,-33.23 -21.34,-31.85 -21.34,-29.76 -21.95,-29.15 -21.95,-26.97 -22.72,-26.2 -22.72,-25.61 -22.42,-25.31 -22.42,-22.28 v2(-23.18,-21.52)
  In8.Cu w0.08: v2(-23.18,-21.52) -24.43,-20.27 -24.43,-19.86 -22.88,-18.31 -22.88,-16.87 -22.42,-16.41 v1(-21.86,-16.41) ; v1(-18.13,11.58) -17.73,11.18 -17.73,6.8 -16.67,5.74 -16.67,-3.4 -16.79,-3.52 -16.79,-11.87 -16.93,-12.01 v2(-17.85,-12.01)
  B.Cu w0.08: J15.45@-21.25,-16.32 -21.34,-16.41 v1(-21.86,-16.41) -21.29,-16.41 J15.45@-21.21,-16.33
RAM_A9: J15.46 R329.1 U28.29 U33.29 | length 83
  F.Cu w0.08: v3(-46.48,-31.3) -42.56,-31.3 -40.37,-33.49 -33.31,-33.49 -33.14,-33.32 v2(-32.51,-33.32)
  F.Cu w0.3: U28.29@-47.285,-29.37 -47.285,-30.495 v3(-47.19,-30.59)
  In1.Cu w0.08: v3(-47.19,-30.59) v3(-46.48,-31.3) ; v3(-32.555,-43.05) -32.51,-43.005 v2(-32.51,-33.32)
  In8.Cu w0.08: v2(-32.51,-33.32) -32.48,-33.32 -31.71,-32.55 -29,-32.55 -28.93,-32.62 -25.84,-32.62 -24.89,-31.67 -24.89,-18.43 -24.45,-17.99 -24.02,-17.99 -23.82,-17.79 -23.82,-17.43 -23.19,-16.8 -23.19,-16.37 -23.18,-16.37 v1(-22.67,-15.86) -22.16,-15.86 -21.73,-15.43 -21.73,-8.82 -22.23,-8.32 -22.23,-6.97 -21.12,-5.86 -21.12,-4.78 -19.45,-3.11 -19.45,-1.5 -19.03,-1.08 -18.25,-1.08 -17.43,-0.26 -17.43,1.42 -17.86,1.85 -18.6,1.85 -19.48,2.73 -19.48,7.57 -19.91,8 v1(-19.91,8.53)
  B.Cu w0.2: v1(-22.67,-15.86) v1@-22.64,-15.83
  B.Cu w0.3: v1(-22.67,-15.86) -22.63,-15.82 J15.46@-21.25,-15.82
RAM_A10: J15.16 R151.2 R345.1 U28.17 U33.17 | length 70
  F.Cu w0.08: U28.17@-48.085,-18.095 -48.085,-20.645 -46.46,-22.27 -33.61,-22.27 v3(-33.59,-22.29) -30.44,-22.29 -29.075,-20.925 -28.085,-20.925 -27.95,-21.06 v3(-27.2,-21.06)
  In1.Cu w0.08: v3(-33.59,-22.29) -33.59,-27.54 -34.06,-28.01 -34.06,-31.07 v3(-33.355,-31.775) ; v3(-27.2,-21.06) -27.2,-17.98 v3(-27.31,-17.87) -25.28,-17.87 -24.6,-17.19 v2(-24.6,-16.33)
  In8.Cu w0.08: v1(-26.25,-16.32) -26.25,-14.74 -26.36,-14.63 -26.36,-13.18 -24.87,-11.69 -24.87,-9.82 -25.78,-8.91 -25.78,-6.97 -24.98,-6.17 -24.98,-4.22 -23.47,-2.71 v1(-23.47,-2.41) ; v1(-21.37,-2.4) -20.74,-2.4 -20.49,-2.15 -20.49,0.51 -20.68,0.7 -20.68,3.85 -21.1,4.27 v1(-21.1,5.2)
  B.Cu w0.08: v1(-23.47,-2.41) -21.38,-2.41 v1(-21.37,-2.4)
  B.Cu w0.3: v1(-26.25,-16.32) -24.61,-16.32 v2(-24.6,-16.33)
RAM_A11: J15.15 R157.1 R335.1 U28.16 U33.16 | length 76
  F.Cu w0.08: U28.16@-47.285,-18.095 -47.285,-17.185 -47,-16.9 -43.92,-16.9 -41.71,-19.11 -31.81,-19.11 v3(-31.74,-19.18) -31.71,-19.18 -30.1,-17.57 -30.1,-16.67 -29.91,-16.48 -28.23,-16.48 v2(-28.14,-16.39)
  F.Cu w0.3: U33.16@-32.555,-31.775 -32.555,-30.975 v3(-32.34,-30.76) ; v2(-28.14,-16.39) -28.12,-16.41 R157.1@-27.43,-16.41 -26.73,-16.41 v3(-26.72,-16.42)
  In1.Cu w0.08: v3(-32.34,-30.76) -31.82,-30.76 -31.46,-30.4 -31.46,-21.55 -32.01,-21 -32.01,-20.14 -31.74,-19.87 v3(-31.74,-19.18) ; v2(-26.96,-1.61) -26.37,-2.2 -26.37,-4.99 -26.05,-5.31 -26.05,-8.01 -26.22,-8.18 -26.22,-15.92 v3(-26.72,-16.42)
  In8.Cu w0.08: v1(-27.04,4.89) -27,4.85 -27,-1.57 v2(-26.96,-1.61) ; v1(-24.39,4.9) -24.39,5.29 -24.33,5.35 -24.33,8.25 -23.9,8.68 -23.9,10.38 v1(-24.28,10.76)
  B.Cu w0.08: v1(-27.04,4.89) -24.4,4.89 v1(-24.39,4.9) ; v1(-24.28,10.76) -23.5,10.76 -23.1,10.36 -20.86,10.36 -20.65,10.57 -20.65,11.16 R335.1@-21.07,11.58
  B.Cu w0.2: v2(-28.14,-16.39) -27.57,-15.82 J15.15@-26.25,-15.82
RAM_ID0: J15.60 R158.1 U35.31 | length 40.4
  F.Cu w0.08: v2(-23.64,-11.35) -23.64,-12.3 -23.25,-12.69 -23.21,-12.69 -23.2,-12.7 -23.07,-12.7 -22.65,-13.12 -22.65,-13.57 -21.42,-14.8 R158.1@-20.56,-14.8 -20.56,-14.65 -20.17,-14.26 -14.25,-14.26 v3(-14.18,-14.19) ; v3(-12.14,-17.48) -12.14,-18.51 -11.085,-19.565 -1.295,-19.565 -1.29,-19.57 -1.27,-19.57 v3(-0.93,-19.23)
  F.Cu w0.2: v3(2.34,-19.08) 2.6,-19.34 3.11,-19.34 3.3,-19.15 4.46,-19.15
  In1.Cu w0.08: v3(-14.18,-14.19) -13.88,-13.89 -12.91,-13.89 -12.18,-14.62 -12.18,-17.44 v3(-12.14,-17.48) ; v3(-0.93,-19.23) 1.02,-19.23 1.17,-19.08 v3(2.34,-19.08)
  B.Cu w0.08: v2(-23.64,-11.35) -23.32,-11.03 -23.32,-9.08 -23.06,-8.82 -21.22,-8.82 J15.60@-21.21,-8.83
RAM_ID1: J15.31 R148.1 U35.32 | length 81.2
  F.Cu w0.08: v3(5.47,-36.55) 5.71,-36.55 5.9,-36.36 6.59,-36.36 7.11,-36.88 8.4,-36.88 8.71,-36.57 v3(9.28,-36.57) ; v3(8.69,-23.35) 8.69,-23.82 9.61,-24.74 v3(10.5,-24.74)
  F.Cu w0.2: 4.46,-18.65 4.48,-18.63 v3(5.63,-18.63)
  F.Cu w0.3: R148.1@-20.87,-25.53 v2(-20.11,-25.53)
  In1.Cu w0.08: v2(4.05,-36.21) 5.13,-36.21 v3(5.47,-36.55) ; v3(5.63,-18.63) 5.74,-18.63 6.24,-18.13 7.53,-18.13 7.97,-18.57 7.97,-19.5 8.17,-19.7 8.17,-20.31 7.2,-21.28 7.2,-21.89 7.31,-22 7.31,-22.76 7.9,-23.35 v3(8.69,-23.35) ; v3(9.28,-36.57) 9.28,-36.31 11.69,-33.9 11.69,-32.92 11.47,-32.7 11.47,-29.4 10.54,-28.47 10.54,-24.78 v3(10.5,-24.74)
  In5.Cu w0.08: v2(-24.18,-36.16) -23.52,-36.16 -23.38,-36.3 -17.73,-36.3 -17.38,-35.95 1.82,-35.95 2.07,-35.7 3.54,-35.7 v2(4.05,-36.21)
  In6.Cu w0.08: v2(-24.18,-36.16) -22.97,-36.16 -19.29,-32.48 -19.29,-27.45 -20.11,-26.63 v2(-20.11,-25.53)
  B.Cu w0.08: J15.31@-21.21,-23.33 -22.48,-23.33 -22.72,-23.57 -22.72,-25.22 -22.53,-25.41 -21.23,-25.41 -21.11,-25.53 v2(-20.11,-25.53)
RAM_LCASL#: J15.48 R272.2 RA5.3 U33.32 | length 88.3
  F.Cu w0.08: U33.32@-30.105,-43.05 -30.105,-40.905 -29.57,-40.37 v3(-28.18,-40.37)
  In1.Cu w0.08: v3(-28.18,-40.37) -28.33,-40.22 -28.33,-36.28 -28.02,-35.97 -28.02,-31.74 v2(-28.06,-31.7)
  In6.Cu w0.08: v2(-28.06,-31.7) -28.12,-31.76 -28.12,-34.35 -27.1,-35.37 -23.56,-35.37 -22.98,-34.79 -22.98,-32.84 -21.63,-31.49 -21.63,-29.98 -22.21,-29.4 -22.21,-27.15 -22.93,-26.43 -22.93,-25.41 -22.61,-25.09 -22.61,-23.79 -23.825,-22.575 -23.825,-21.095 -23.48,-20.75 -23.48,-18.88 -25.24,-17.12 -25.24,-13.65 -23.84,-12.25 v2(-23.07,-12.25)
  In8.Cu w0.08: v1(-22.238,-14.864) -22.238,-13.082 v2(-23.07,-12.25) -24.04,-12.25 -24.59,-11.7 -24.59,-9.64 -24.39,-9.44 -24.39,-5.73 -24.78,-5.34 -24.78,-4.69 -23.16,-3.07 -23.16,3.3 -23.3,3.44 -23.3,4.14 -23.18,4.26 -23.18,9.08 -22.345,9.915 -22.345,10.975 -22.35,10.98 -22.35,11.3 -21.77,11.88 -21.77,12.91 -23.11,14.25 v1(-23.11,14.775) -20.325,14.775 v1(-18.95,16.15)
  B.Cu w0.08: J15.48@-21.25,-14.82 -21.294,-14.864 v1(-22.238,-14.864) -21.244,-14.864 J15.48@-21.21,-14.83
RAM_LCASU#: J15.12 R274.2 RA5.1 U28.32 | length 69.4
  F.Cu w0.08: U28.32@-44.835,-29.37 -44.835,-28.305 -43.23,-26.7 v2(-42.64,-26.7)
  In8.Cu w0.08: v1(-31.7,-22.3) -31.7,-15.25 -30.86,-14.41 v1(-28.48,-14.41) ; v1(-26.71,-14.35) -26.71,-13.14 -25.18,-11.61 -25.18,-9.96 -26.04,-9.1 -26.04,-6.86 -25.25,-6.07 -25.25,-2.63 -24.63,-2.01 -23.78,-2.01 -23.36,-1.59 -23.36,-0.03 -23.5,0.11 -23.5,10.93 -24.29,11.72 -24.29,14.59 -23.71,15.17 -23.71,16.03 v1(-24.02,16.34) ; v1(-22.21,16.36) -21.95,16.1 -20.47,16.1 -20.42,16.15 v1(-19.97,16.15)
  B.Cu w0.08: v2(-42.64,-26.7) -42.64,-23.94 -41,-22.3 v1(-31.7,-22.3) ; v1(-28.48,-14.41) -27.99,-14.41 -27.93,-14.35 v1(-26.71,-14.35) -26.28,-14.35 J15.12@-26.25,-14.32 ; v1(-24.02,16.34) -23.985,16.375 RA5.1@-23.11,16.375 -22.225,16.375 v1(-22.21,16.36)
RAM_UCASL#: J15.47 R159.1 RA5.4 U33.31 | length 73.1
  F.Cu w0.08: U33.31@-30.955,-43.05 -30.98,-43.025 -30.98,-39.59 -30.15,-38.76 v3(-29.25,-38.76) ; v2(-23.82,-16.48) -23.19,-15.85 R159.1@-20.61,-15.85
  In1.Cu w0.08: v3(-29.25,-38.76) -29.25,-36.15 -28.75,-35.65 -28.75,-30.18 -28.95,-29.98 -28.95,-25.65 -29.04,-25.56 -29.04,-22.81 -28.06,-21.83 -27.43,-21.83 -26.03,-20.43 -25.1,-20.43 -23.82,-19.15 v2(-23.82,-16.48)
  In4.Cu w0.08: v2(-23.82,-16.48) -25.04,-15.26 -25.04,-15.24 -25.17,-15.11 -25.17,-9.85 -23.64,-8.32 -23.64,3.82 -23.65,3.83 -23.65,8.41 -24.22,8.98 -24.22,12.68 -22.89,14.01 v2(-21.6,14.01)
  B.Cu w0.08: v2(-23.82,-16.48) -22.66,-15.32 -21.22,-15.32 J15.47@-21.21,-15.33 ; RA5.4@-23.11,13.975 -21.635,13.975 v2(-21.6,14.01)
RAM_UCASU#: J15.13 R261.2 RA5.2 U28.31 | length 74.2
  F.Cu w0.08: U28.31@-45.685,-29.37 -45.685,-28.195 v2(-45.22,-27.73)
  In8.Cu w0.08: v1(-27.72,-14.91) -27.38,-14.57 -27.38,-14.37 -27.38,-13.38 -27,-13 -25.48,-11.48 -25.48,-10.59 -25.48,-10.1 -25.93,-9.65 -26.26,-9.32 -26.31,-9.27 -26.31,-9.12 -26.31,-6.76 -25.95,-6.4 -25.51,-5.96 -25.51,-5.63 -25.51,-2.27 -25.63,-2.15 -25.63,-0.67 -25.63,-0.74 -25.63,5.39 -25.53,5.49 -25.53,6.64 -25.67,6.78 -25.67,7.69 -25.39,7.97 -25.39,9.77 -25.09,10.07 -25.09,11.76 -24.52,12.33 -24.52,14.93 v1(-24.03,15.42) ; v1(-25.21,-27.77) -25.21,-15.64 v1(-24.73,-15.16)
  B.Cu w0.08: v2(-45.22,-27.73) -42.26,-27.73 -42.08,-27.91 -38.71,-27.91 -38.52,-27.72 -25.26,-27.72 v1(-25.21,-27.77) ; v1(-24.03,15.42) -23.875,15.575 RA5.2@-23.11,15.575 -22.125,15.575 -21.55,16.15 R261.2@-21.07,16.15
  B.Cu w0.2: v1(-27.72,-14.91) -27.63,-14.82 J15.13@-26.25,-14.82 -25.07,-14.82 v1(-24.73,-15.16)
RAMWE#: J15.50 R154.1 U28.14 U33.14 | length 53.5
  F.Cu w0.08: U28.14@-45.685,-18.095 -45.685,-19.275 -44.83,-20.13 -31.81,-20.13 v3(-31.49,-20.45) ; U33.14@-30.955,-31.775 -30.93,-31.75 v3(-30.93,-30.24) -29.01,-30.24 v3(-28.38,-29.61) ; v3(-22.89,-17.37) -22.05,-18.21 R154.1@-21.36,-18.21
  In1.Cu w0.08: v3(-31.49,-20.45) -31.49,-20.86 -30.93,-21.42 v3(-30.93,-30.24) ; v3(-28.38,-29.61) -28.38,-28.62 -28.57,-28.43 -28.57,-25.22 -28.64,-25.15 -28.64,-23.31 -28.14,-22.81 -27.1,-22.81 -26.865,-22.575 -26.865,-21.935 -26.215,-21.285 -25.575,-21.285 -22.89,-18.6 v3(-22.89,-17.37) -22.89,-15.76 -23.05,-15.6 v2(-23.05,-15.11)
  B.Cu w0.08: v2(-23.05,-15.11) -23.05,-14.67 -23.27,-14.45 -23.27,-14.04 -23.04,-13.81 -21.23,-13.81 J15.50@-21.21,-13.83
RESET: D18.1 D18.3 R110.1 U22.55 U51.K10 U66.11 U74.T3 | length 243.2
  F.Cu w0.08: v3(-29.36,-5.19) -29.01,-5.19 -28.94,-5.12 -24.37,-5.12 v2(-24.32,-5.07) ; U22.55@18.63,-11.26 18.63,-10.23 18.31,-9.91 18.31,-9.02 18.59,-8.74 19.5,-8.74 19.74,-8.98 v2(20.88,-8.98)
  F.Cu w0.5: D18.3@-35.89,-1.275 D18.1@-34.565,-1.275 -33.985,-1.275 -33.62,-1.64 R110.1@-33.09,-1.64 -32.51,-1.64 v3(-32.46,-1.69)
  In1.Cu w0.08: v3(-32.46,-1.69) -31.89,-1.69 -31.54,-2.04 -31.54,-3.93 -30.28,-5.19 v3(-29.36,-5.19)
  In3.Cu w0.08: v2(-13.25,-2.98) -13.15,-2.88 -7.95,-2.88 -7.25,-2.18 6.89,-2.18 7.67,-1.4 14.2,-1.4 15.24,-2.44 15.24,-3.92 16.63,-5.31 31.56,-5.31 31.91,-4.96 40.94,-4.96 41.85,-5.87 49.03,-5.87 49.93,-4.97 51.95,-4.97 52.96,-5.98 56.26,-5.98 56.52,-6.24 58.1,-6.24 58.18,-6.32 v4(58.31,-6.32) ; v2(20.88,-8.98) 20.92,-8.98 21.39,-9.45 25.79,-9.45 26.02,-9.68 26.06,-9.68 26.07,-9.69 34.18,-9.69 34.41,-9.92 37.44,-9.92 37.97,-9.39 40.2,-9.39 41.11,-8.48 44.32,-8.48 45.26,-9.42 51.32,-9.42 v4(51.82,-9.92)
  In4.Cu w0.08: v4(51.82,-9.92) 54.69,-9.92 58.29,-6.32 v4(58.31,-6.32) 58.82,-6.83 58.82,-9.39 63.46,-14.03 v4(64.81,-14.03)
  In5.Cu w0.08: v2(-24.32,-5.07) -23.42,-4.17 -15.74,-4.17 -14.55,-2.98 v2(-13.25,-2.98)
  In6.Cu w0.08: v2(-13.25,-2.98) -14.39,-1.84 -14.39,0.81 -14.22,0.98 -14.22,1.03 -13.85,1.4 -13.85,3.42 -13.39,3.88 -13.39,5.7 -13.23,5.86 -13.23,8.61 -12.62,9.22 -12.62,13.09 -13.4,13.87 -13.4,19.05 -12.67,19.78 -12.67,25.23 -12.42,25.48 -12.42,28.47 -13.12,29.17 -13.12,32.19 -12.89,32.42 -12.72,32.42 -12.57,32.57 -12.57,33.03 -12.7,33.16 -12.7,34.21 -13.41,34.92 -13.41,40.47 -13.06,40.82 -12.59,40.82 -12.17,41.24 -12.17,41.98 -11.87,42.28 -11.87,43.36 -11.43,43.8 -8.79,43.8 -7.62,42.63 -7.62,40.22 -8.07,39.77 -8.61,39.77 -9.56,38.82 v2(-9.56,38.68)
  In8.Cu w0.08: v1(-17.89,34.11) -18.14,34.36 -18.71,34.36 -19.31,34.96 -19.31,36.84 -19.54,37.07 -19.54,37.66 -19.33,37.87 -18.68,37.87 -18.4,37.59 -11.73,37.59 -11.65,37.67 -11.33,37.67 -10.32,38.68 v2(-9.56,38.68)
  B.Cu w0.08: v1(-17.89,34.11) U51.K10@-17.67,34.11 ; U74.T3@17.03,-10.83 17.03,-10.8 17.82,-10.01 18.75,-10.01 19.24,-9.52 19.24,-8.64 19.67,-8.21 20.15,-8.21 20.38,-8.44 20.38,-8.77 20.59,-8.98 v2(20.88,-8.98) ; v4(64.81,-14.03) 65.22,-14.44 65.88,-14.44 65.97,-14.35 U66.11@67.007,-14.35
RIOUT#: U39.6 U74.C8 | length 40.4
  F.Cu w0.3: U39.6@42.99,-32.55 v2(42.99,-31.58)
  In8.Cu w0.08: v1(23.3,-27.62) 23.05,-27.87 23.05,-29.59 25.51,-32.05 27.11,-32.05 27.23,-32.17 29.34,-32.17 29.61,-32.44 29.61,-33.45 30.61,-34.45 30.61,-37.36 v1(30.63,-37.38) ; v1(42.54,-40.87) 43.52,-39.89 43.52,-32.58 42.99,-32.05 v2(42.99,-31.58)
  B.Cu w0.08: U74.C8@23.38,-27.34 23.3,-27.42 v1(23.3,-27.62) 23.3,-27.39 U74.C8@23.38,-27.31 ; v1(30.63,-37.38) 30.63,-37.88 32.11,-39.36 36.26,-39.36 37.87,-40.97 42.26,-40.97 42.36,-40.87 v1(42.54,-40.87)
RTCBAT: C70.2 C80.1 C82.1 D21.2 R116.2 R119.2 R248.2 U19.8 U61.T11 | length 67
  F.Cu w0.3: C70.2@-19.53,1.69 -19.53,2.11 -19.36,2.28 U19.8@-19.36,3.69 -18.8,3.69 v2(-18.78,3.71)
  F.Cu w0.4: R116.2@7.17,7.92 7.2,7.95 v2(7.82,7.95) 7.83,7.96 9.28,7.96 9.83,8.51 C82.1@9.83,9.55 10.53,9.55 v2(10.96,9.98)
  F.Cu w0.5: R119.2@11.08,9.19 11.08,9.86 v2(10.96,9.98) 11.31,10.33 11.31,11.885 C80.1@11.305,11.89 ; v2(14.99,5.94) 15.215,5.94 D21.2@15.95,6.675
  In3.Cu w0.5: v2(-18.78,3.71) -18.78,4.62 -18.11,5.29 -16.78,5.29 -14.03,8.04 7.73,8.04 v2(7.82,7.95) ; v2(10.96,9.98) 10.96,9.97 10.38,9.39 10.38,7.63 10.96,7.05 13.88,7.05 v2(14.99,5.94)
  In6.Cu w1: v2(10.96,9.98) 10.22,10.72 10.22,22.12 v2(11.62,23.52)
  B.Cu w0.4: U61.T11@7.18,8.65 7.82,8.01 v2(7.82,7.95)
  B.Cu w0.5: v2(11.62,23.52) 11.62,24.72 12.11,25.21 R248.2@12.92,25.21
SA0: J11.39 U7.11 U21.55 U22.26 U35.8 U42.35 U59.21 U61.E15 U74.F5 | length 403.9
  F.Cu w0.08: v3(-45.88,4.88) -45.52,4.88 -45.41,4.99 -32.92,4.99 -32.77,4.84 v3(-32.39,4.84) ; v3(-25.63,9.81) -25.615,9.825 U7.11@-24.362,9.825 ; v3(-6.48,-11.68) -5.38,-11.68 -5.18,-11.88 U21.55@-5.18,-12.94 ; v3(14.47,-16.44) 14.86,-16.05 v3(18.55,-16.05) ; U22.26@15.03,2.39 16.58,2.39 16.79,2.18 16.79,1.25 17.01,1.03 17.32,1.03 17.32,1.01 v2(18.17,0.16) ; v3(61.02,-13.26) 61.71,-12.57 65.93,-12.57 67.37,-14.01 68.86,-14.01 69.07,-13.8 v5(69.07,-13.51) ; v3(87.51,-15.68) 87.52,-15.68 88.15,-15.05 U42.35@89.36,-15.05
  In1.Cu w0.08: v2(-48.97,-4.25) -48.97,-3.61 -49.3,-3.28 -49.3,2.51 -47.79,4.02 -46.45,4.02 -45.88,4.59 v3(-45.88,4.88) ; v3(-32.39,4.84) -32.37,4.86 -32.37,8.4 -30.73,10.04 -26.16,10.04 -25.93,9.81 v3(-25.63,9.81) ; v3(-6.48,-11.68) -6.48,-11.26 -6.66,-11.08 -6.66,-6.83 -5.98,-6.15 -5.98,-1.79 v2(-5.65,-1.46) ; v3(14.47,-16.44) 14.47,-15.97 14.51,-15.93 v3(14.51,-14.5) ; v3(18.55,-16.05) 19.08,-16.58 v2(21.48,-16.58) ; v3(54.39,-12.68) 54.99,-12.68 55.57,-13.26 v3(61.02,-13.26) ; v4(87,-19.79) 86.73,-19.79 86.68,-19.74 86.68,-16.2 87.2,-15.68 v3(87.51,-15.68)
  In3.Cu w0.08: v2(21.48,-16.58) 22.16,-15.9 31.94,-15.9 33.88,-13.96 37.98,-13.96 38.4,-13.54 42.13,-13.54 43.08,-14.49 47.38,-14.49 49.5,-16.61 49.5,-18.18 50.18,-18.86 53.98,-18.86 54.64,-18.2 57.6,-18.2 58.19,-17.61 59.53,-17.61 60.09,-18.17 79.75,-18.17 80.64,-17.28 84.62,-17.28 87,-19.66 v4(87,-19.79)
  In4.Cu w0.08: v2(18.17,0.16) 19.19,-0.86 19.19,-4.98 20.49,-6.28 20.49,-16.12 20.95,-16.58 v2(21.48,-16.58)
  In5.Cu w0.08: v2(-48.97,-4.25) -49.03,-4.19 -49.65,-4.19 -50.21,-3.63 -50.21,14.66 -49.46,15.41 -48.33,15.41 -48.2,15.28 -48.2,12.42 -46.41,10.63 -44.51,10.63 -43.54,9.66 -42.62,9.66 -37.59,4.63 -14.75,4.63 -13.81,3.69 -13.81,0.76 -12.63,-0.42 -12.22,-0.42 -12.04,-0.24 -12.04,0.12 -11.84,0.32 -10.79,0.32 -10.63,0.16 -8.67,0.16 -7.62,-0.89 -6.22,-0.89 v2(-5.65,-1.46) -5.01,-0.82 -5.01,0.26 -4.65,0.62 1.07,0.62 1.41,0.96 4.47,0.96 5.86,-0.43 7.17,-0.43 7.405,-0.665 9.905,-0.665 10,-0.57 15.89,-0.57 16.11,-0.79 16.16,-0.79 16.18,-0.81 16.65,-0.81 17.49,-1.65 18.39,-1.65 18.73,-1.31 18.73,-0.06 18.51,0.16 v2(18.17,0.16)
  In8.Cu w0.08: v1(-5.78,1.63) -5.95,1.46 -5.95,-0.69 -5.65,-0.99 v2(-5.65,-1.46) ; v1(19.62,-22.93) 19.96,-22.93 21.1,-21.79 21.1,-17.52 21.48,-17.14 v2(21.48,-16.58) ; v1(41.31,10.12) 45.1,10.12 v1(45.11,10.11) ; v1(47.08,2.48) 47.49,2.48 48.04,1.93 52.11,1.93 53.19,0.85 53.19,-0.96 53.69,-1.46 54.71,-1.46 56.62,-3.37 57.08,-3.37 v1(57.36,-3.65) ; v1(57.4,-5.75) 58.5,-5.75 v1(58.8,-6.05) ; v1(65.76,-8.81) 65.76,-6.61 66.35,-6.02 v1(68.38,-6.02) ; v5(69.07,-13.51) 69.55,-13.03 69.55,-10.24 70.79,-9 70.79,-6.08 v1(70.75,-6.04)
  B.Cu w0.08: U61.E15@-6.79,3.57 -6.12,2.9 -6.12,1.97 v1(-5.78,1.63) ; U74.F5@19.57,-23.5 19.57,-22.98 v1(19.62,-22.93) ; U59.21@34.59,3.54 33.6,3.54 33.42,3.36 32.53,3.36 32.29,3.12 31.91,3.12 31.52,2.73 31.06,2.73 30.86,2.53 30.86,2.22 30.6,1.96 29.5,1.96 29.31,2.15 28.7,2.15 27.94,2.91 26.76,2.91 26.25,2.4 23.9,2.4 23.74,2.24 23.74,1.02 23.42,0.7 21.74,0.7 21.41,0.37 18.38,0.37 v2(18.17,0.16) 18.17,2.16 19.34,3.33 21.3,3.33 22.32,4.35 22.79,4.35 23.5,5.06 23.5,6.81 23.83,7.14 23.83,8.27 24.34,8.78 32.94,8.78 33.91,7.81 35.76,7.81 36.33,7.24 36.76,7.24 39.4,9.88 41.05,9.88 41.29,10.12 v1(41.31,10.12) ; v1(45.11,10.11) 45.11,9.77 45.63,9.25 46.75,9.25 47.1,8.9 47.1,7.79 47.61,7.28 47.61,4.43 47.23,4.05 47.23,3.12 47.08,2.97 v1(47.08,2.48) ; v1(57.36,-3.65) 57.36,-5.71 v1(57.4,-5.75) ; v1(58.8,-6.05) 58.8,-8.37 59.16,-8.73 62.69,-8.73 62.76,-8.66 65.25,-8.66 65.4,-8.81 v1(65.76,-8.81) ; v1(68.38,-6.02) 70.73,-6.02 v1(70.75,-6.04)
SA1: J11.37 U4.42 U21.56 U22.27 U35.9 U36.13 U42.34 U59.20 U61.E16 U74.D4 | length 284.2
  F.Cu w0.08: v3(-1.45,-29.5) -1.45,-28.56 -1,-28.11 U36.13@0.63,-28.11 ; v3(8.77,22.1) 10.81,22.1 v3(10.83,22.12) ; v3(11.58,-23.88) 11.73,-24.03 15.31,-24.03 15.76,-23.58 v3(15.76,-23.55) ; v3(14.46,-17) 14.66,-17.2 v3(15.97,-17.2) ; U22.27@15.03,1.79 16.1,1.79 v2(16.23,1.92) ; v3(51.29,-23.31) 51.29,-22.12 51.35,-22.06 v3(51.35,-21.53)
  F.Cu w0.2: U21.56@-4.68,-12.94 -4.68,-13.89 v3(-4.38,-14.19)
  In1.Cu w0.08: v3(-4.38,-14.19) -4.06,-14.51 -4.06,-18.02 -4.17,-18.13 -4.17,-25.12 -3.92,-25.37 -3.92,-30.39 -3.34,-30.97 -0.77,-30.97 0.06,-30.14 0.06,-29.4 ; v3(-1.45,-29.5) -1.12,-29.5 -1.02,-29.4 0.06,-29.4 ; v3(5.5,38.69) 5.5,35.09 6.32,34.27 6.32,26.94 8.45,24.81 8.45,22.42 v3(8.77,22.1) ; v3(10.83,22.12) 10.83,15.22 12.12,13.93 12.12,9.79 14.04,7.87 v2(14.04,5.59) ; v3(11.58,-23.88) 11.3,-24.16 9.09,-24.16 8.67,-24.58 8.67,-25.79 8.45,-26.01 8.1,-26.01 7.82,-25.73 5.78,-25.73 5.31,-25.26 4.05,-25.26 3.4,-25.91 2.28,-25.91 0.63,-27.56 0.63,-29.16 0.39,-29.4 0.06,-29.4 ; v3(14.01,-14.5) 14.01,-15.87 14.12,-15.98 14.12,-16.66 v3(14.46,-17) ; v3(15.97,-17.2) 15.97,-20.75 15.63,-21.09 15.63,-22.89 15.76,-23.02 v3(15.76,-23.55) 15.86,-23.45 16.65,-23.45 16.94,-23.74 18.07,-23.74 18.19,-23.86 18.19,-26.2 v2(17.67,-26.72) ; v3(51.29,-23.31) 51.29,-25.16 52.42,-26.29 52.42,-28.13 52.12,-28.43 v5(51.52,-28.43) ; v3(51.35,-21.53) 50.57,-20.75 50.57,-15.25 51.64,-14.18 54.19,-14.18 v3(54.39,-13.98) ; v4(88.64,-26.2) 88.64,-24.96 88.41,-24.73 88.41,-20.05 89.79,-18.67 89.79,-16.055 v3(89.385,-15.65)
  In3.Cu w0.08: v2(17.67,-26.72) 17.78,-26.72 18.41,-27.35 28.4,-27.35 28.62,-27.13 35.04,-27.13 35.36,-26.81 36.83,-26.81 37,-26.64 37.53,-26.64 37.86,-26.97 37.86,-27.52 38.82,-28.48 41.45,-28.48 42.01,-29.04 50.75,-29.04 51.36,-28.43 v5(51.52,-28.43) 52.2,-28.43 52.55,-28.78 61.51,-28.78 62.44,-27.85 74.26,-27.85 76.25,-29.84 80.67,-29.84 80.94,-29.57 83.89,-29.57 85.14,-28.32 86.4,-28.32 88.52,-26.2 v4(88.64,-26.2)
  In4.Cu w0.08: v2(14.04,5.59) 14.04,3.3 15.42,1.92 v2(16.23,1.92)
  In6.Cu w0.08: v2(16.23,1.92) 16.23,1.47 16.62,1.08 17.94,1.08 19.15,-0.13 19.15,-5.09 18.27,-5.97 16.28,-5.97 15.57,-6.68 15.57,-11.47 14.65,-12.39 14.65,-15.36 15.57,-16.28 15.57,-17.12 15.83,-17.38 15.83,-23.02 16.9,-24.09 16.9,-25.95 v2(17.67,-26.72)
  In8.Cu w0.08: v1(-6.94,2.2) -6.85,2.11 v1(-6.85,0.75) ; v1(7.86,0.43) 7.86,1.17 9.02,2.33 10.99,2.33 12.14,1.18 13.08,1.18 13.38,1.48 v1(13.38,3.1) ; v2(14.04,5.59) 14.97,4.66 15.33,4.66 16.29,3.7 v1(16.29,3.66)
  B.Cu w0.08: v1(-6.85,0.75) -6.83,0.77 -3.78,0.77 -3.04,0.03 -2.3,0.03 -1.82,0.51 -0.65,0.51 -0.31,0.17 1.23,0.17 1.7,0.64 2.07,0.64 2.62,1.19 6.16,1.19 6.74,0.61 7.25,0.61 7.43,0.43 v1(7.86,0.43) ; v1(13.38,3.1) 13.82,3.54 U59.20@14.79,3.54 16.17,3.54 v1(16.29,3.66) ; v2(17.67,-26.72) 18.3,-26.09 U74.D4@18.3,-26.04
SA2: J11.35 U4.43 U21.57 U22.28 U35.10 U36.12 U42.33 U59.19 U67.7 U74.C2 | length 317.3
  F.Cu w0.08: v3(-9.51,-17.9) -8.07,-17.9 -7.82,-17.65 -5.43,-17.65 -4.1,-16.32 -4.1,-13.99 -4.18,-13.91 U21.57@-4.18,-12.94 ; v3(-9.38,-26.69) -9.07,-26.38 v2(-7.44,-26.38) -7.44,-27.29 -6.695,-28.035 -2.375,-28.035 v3(-2.34,-28.07) ; v3(0.04,-28.82) 0.54,-28.82 U36.12@0.63,-28.91 ; J11.35@54.39,-15.23 56.93,-15.23 v3(57.58,-15.88) ; v3(60.68,-14.44) 60.72,-14.48 66.5,-14.48 v3(66.51,-14.47) ; v3(87.92,-15.99) 88.08,-16.15 U42.33@89.385,-16.15
  In1.Cu w0.08: v3(-9.51,-17.9) -9.51,-18.29 -9.38,-18.42 v3(-9.38,-26.69) ; v2(-7.44,-26.38) -7.44,-27.55 -7.61,-27.72 -7.61,-32.3 -6.69,-33.22 -5.74,-33.22 -5.33,-33.63 -5.33,-34.76 -2.57,-37.52 -2.57,-39.03 -0.1,-41.5 4.8,-41.5 6.2,-42.9 v2(6.2,-43.24) ; v3(-2.34,-28.07) -2.26,-28.07 -1.39,-28.94 -0.08,-28.94 v3(0.04,-28.82) ; v3(5.5,39.34) 5.5,39.19 5.78,38.91 5.78,38.41 5.77,38.4 5.77,35.18 6.53,34.42 6.53,27.18 8.63,25.08 8.63,22.64 9.08,22.19 9.08,21.12 8.83,20.87 8.83,20.04 9.46,19.41 9.46,15.77 9.05,15.36 9.05,6.15 10.5,4.7 10.5,4.27 11.76,3.01 14.16,3.01 15.03,2.14 v3(15.03,1.29) 15.44,1.29 15.86,0.87 17.1,0.87 17.49,0.48 17.49,0.04 18.19,-0.66 v2(18.19,-1.23) ; v3(13.51,-14.5) 13.51,-15.63 13.93,-16.05 13.93,-19.67 13.09,-20.51 13.09,-21.85 v2(13.7,-22.46) ; v3(57.58,-15.88) 58.17,-15.88 58.28,-15.99 59.92,-15.99 60.68,-15.23 v3(60.68,-14.44) ; v4(66.49,-19.09) 66.49,-14.49 v3(66.51,-14.47) ; v3(87.92,-15.99) 87.92,-15.13 88.98,-14.07 89.56,-14.07 90.37,-14.88 90.37,-19.52 90.65,-19.8 v4(91.09,-19.8)
  In3.Cu w0.08: v2(-7.44,-26.38) -7.43,-26.38 -5.36,-24.31 3.26,-24.31 3.8,-23.77 10.36,-23.77 10.58,-23.55 10.58,-22.82 10.93,-22.47 18.12,-22.47 20.84,-19.75 33.7,-19.75 35,-18.45 37.93,-18.45 39.95,-20.47 41.52,-20.47 41.7,-20.29 42.64,-20.29 43.55,-19.38 46.02,-19.38 47.285,-20.645 47.83,-20.645 47.84,-20.655 49.005,-20.655 50.33,-19.33 54.03,-19.33 54.8,-18.56 57.98,-18.56 58.55,-17.99 59.58,-17.99 59.93,-18.34 65.74,-18.34 v4(66.49,-19.09) 67.45,-20.05 69.39,-20.05 71.02,-18.42 79.89,-18.42 80.84,-17.47 83.78,-17.47 86.62,-20.31 89.28,-20.31 89.79,-19.8 v4(91.09,-19.8)
  In6.Cu w0.08: v2(13.7,-22.46) 15.07,-22.46 15.59,-21.94 15.59,-17.69 14.48,-16.58 14.48,-12.22 15.37,-11.33 15.37,-6.41 16.04,-5.74 18.07,-5.74 18.94,-4.87 18.94,-1.98 v2(18.19,-1.23)
  In8.Cu w0.08: v2(6.2,-43.24) 6.62,-43.66 9.47,-43.66 9.81,-43.32 9.81,-42.46 8.8,-41.45 8.8,-35.23 9.88,-34.15 10.42,-34.15 10.83,-33.74 10.83,-32.23 10.47,-31.87 10.47,-30.83 10.11,-30.47 10.11,-29.47 10.27,-29.31 10.7,-29.31 10.75,-29.36 12.28,-29.36 12.46,-29.18 12.46,-28.7 12.31,-28.55 12.31,-27.6 12.51,-27.4 12.82,-27.4 13.38,-27.96 v1(15.23,-27.96)
  B.Cu w0.08: U59.19@14.79,3.04 16.49,3.04 16.9,2.63 16.9,1.18 17.4,0.68 17.4,0.22 18.19,-0.57 v2(18.19,-1.23) ; v1(15.23,-27.96) 15.23,-27.865 U74.C2@15.765,-27.33 15.765,-27.335 U74.C2@15.76,-27.34 ; U67.7@65.76,-23.41 65.76,-21.29 66.49,-20.56 v4(66.49,-19.09)